# Altium PCB EMI_TestBoard_PCB.PcbDoc
Units mm, origin at the board's own origin, x right, y up, seen from the top; angles counter-clockwise.
Board outline 76 x 51 mm, 4 copper layers (L1 (Sig), L2 (GND), L3 (GND), L4 (Sig)), stack 1.369 mm thick; 63 components, 41 nets, 176 pads, 251 vias.
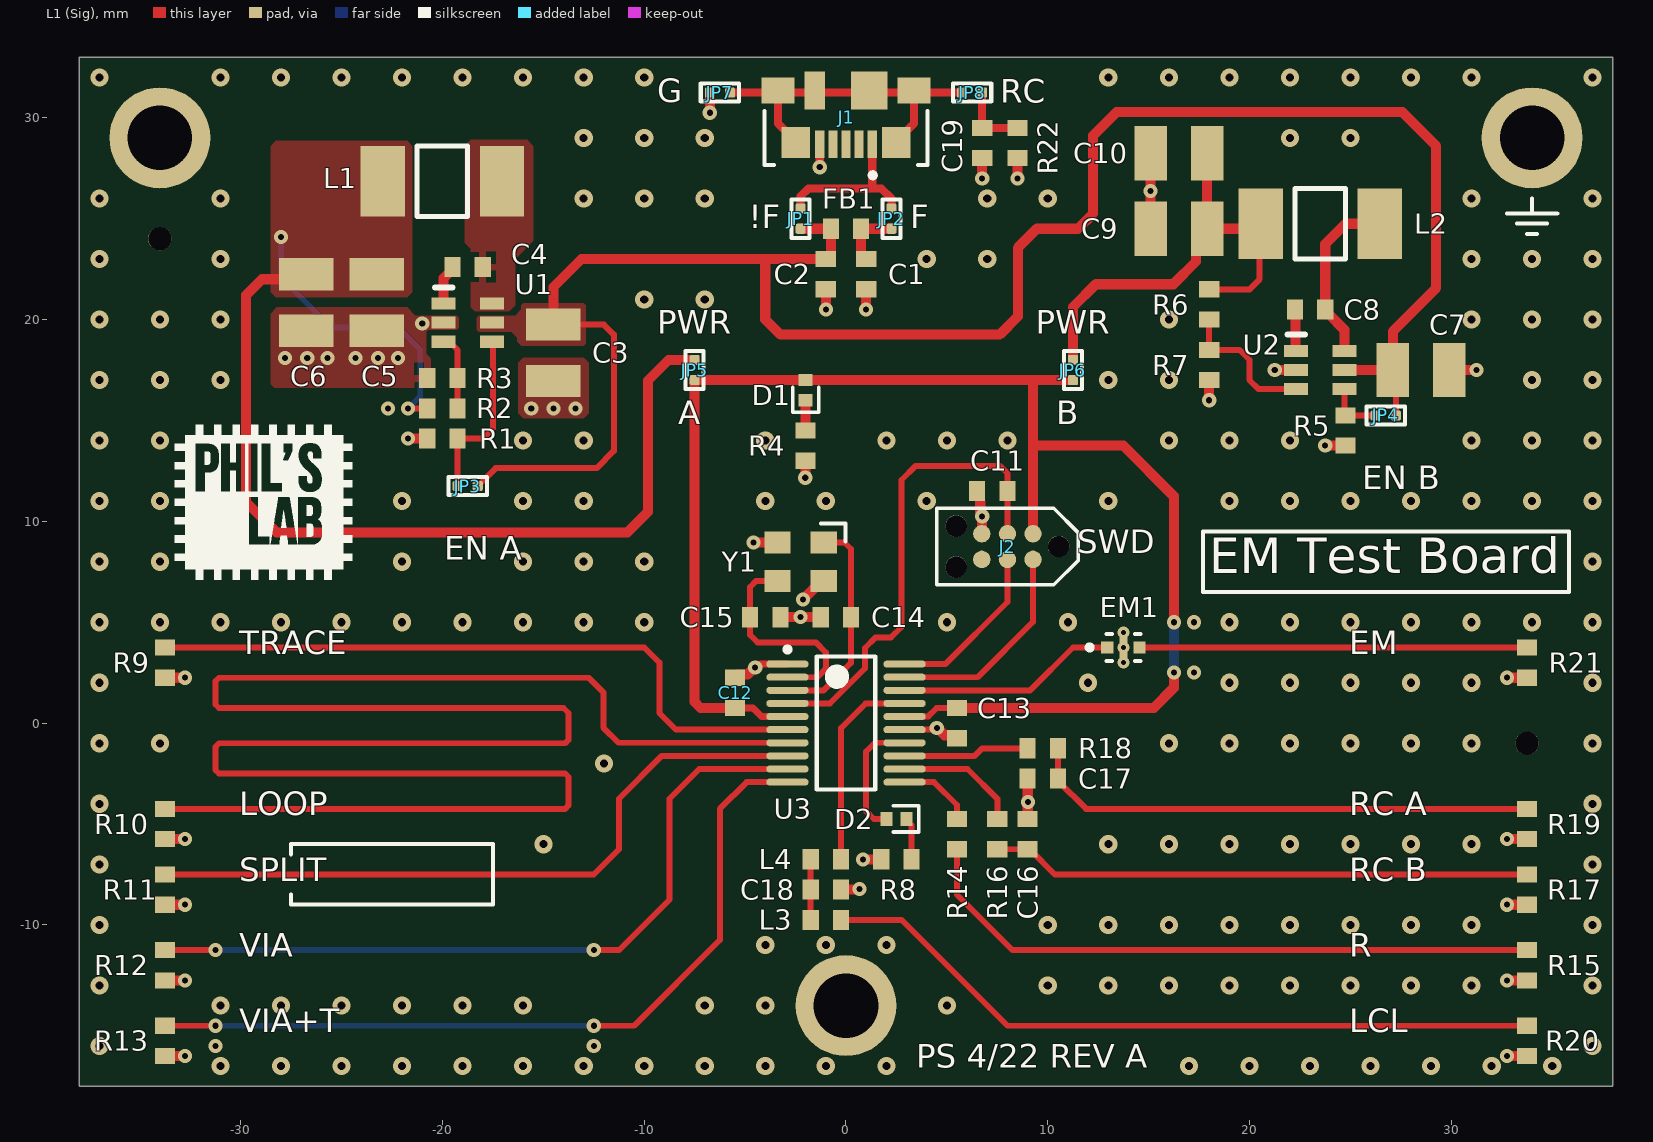
[diagram p0: L1 (Sig) view]
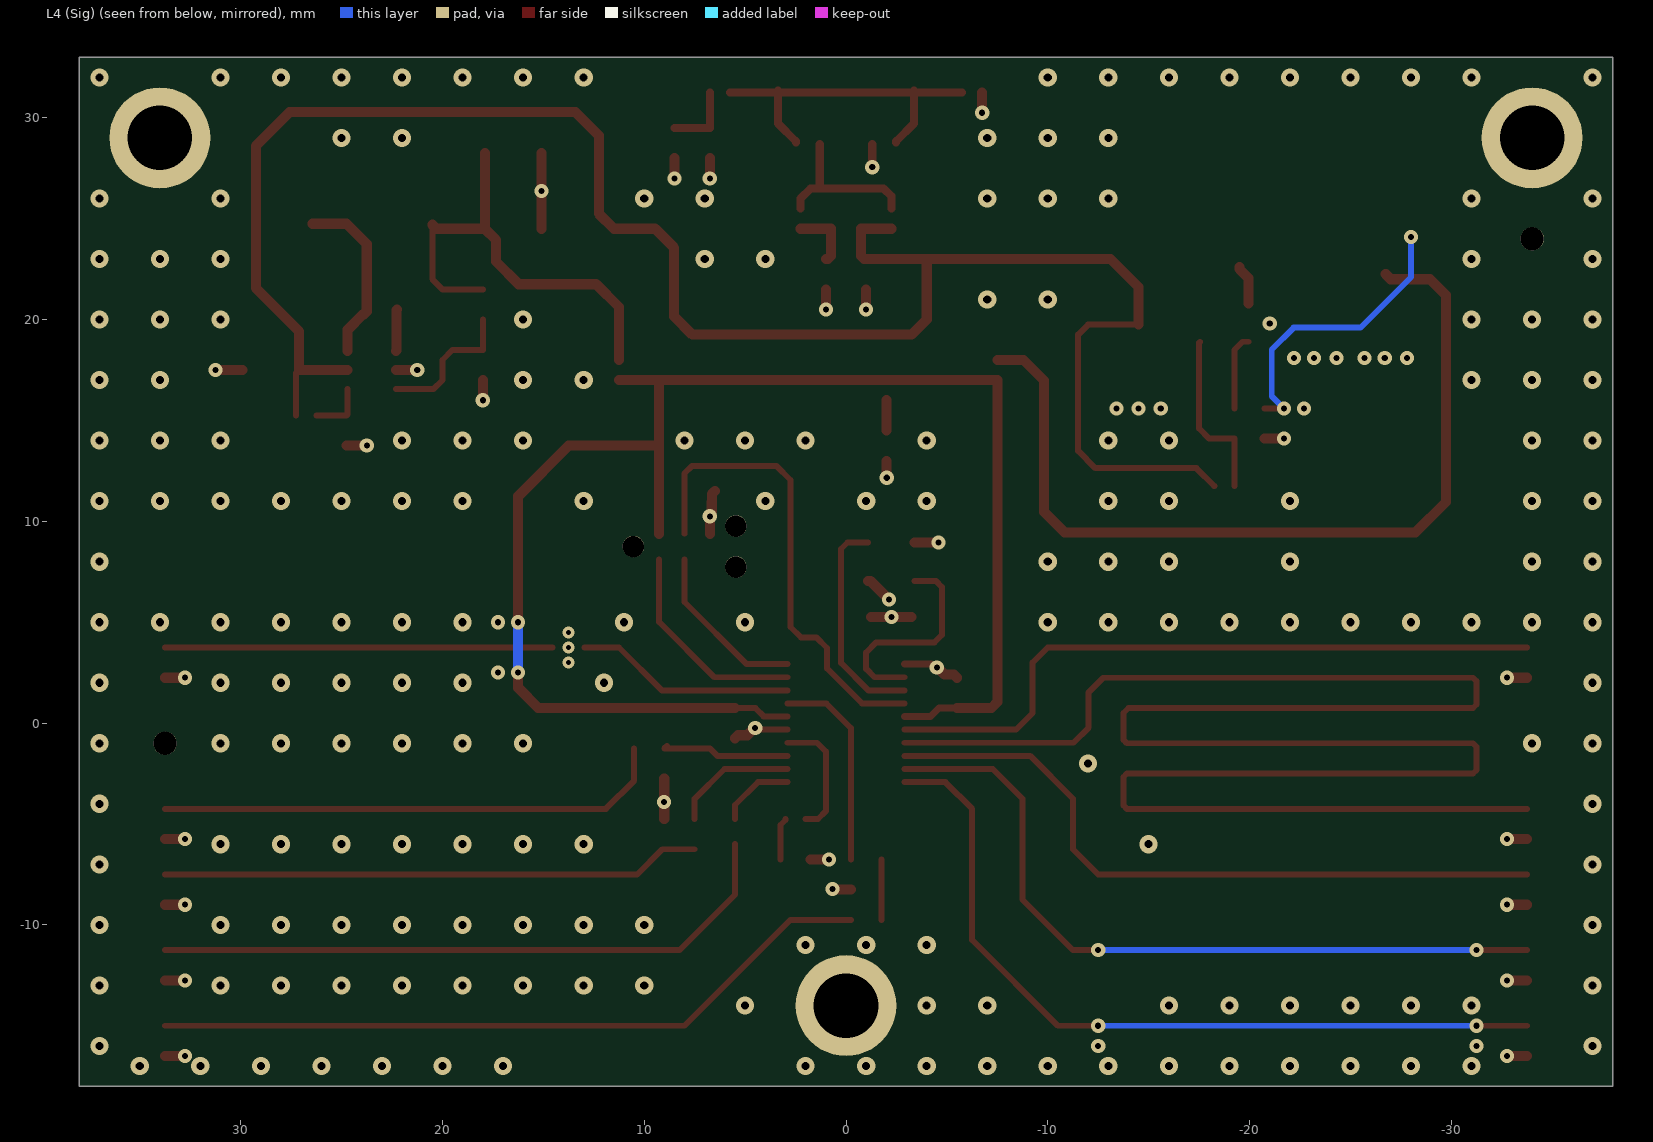
[diagram p1: L4 (Sig) view, seen from below]
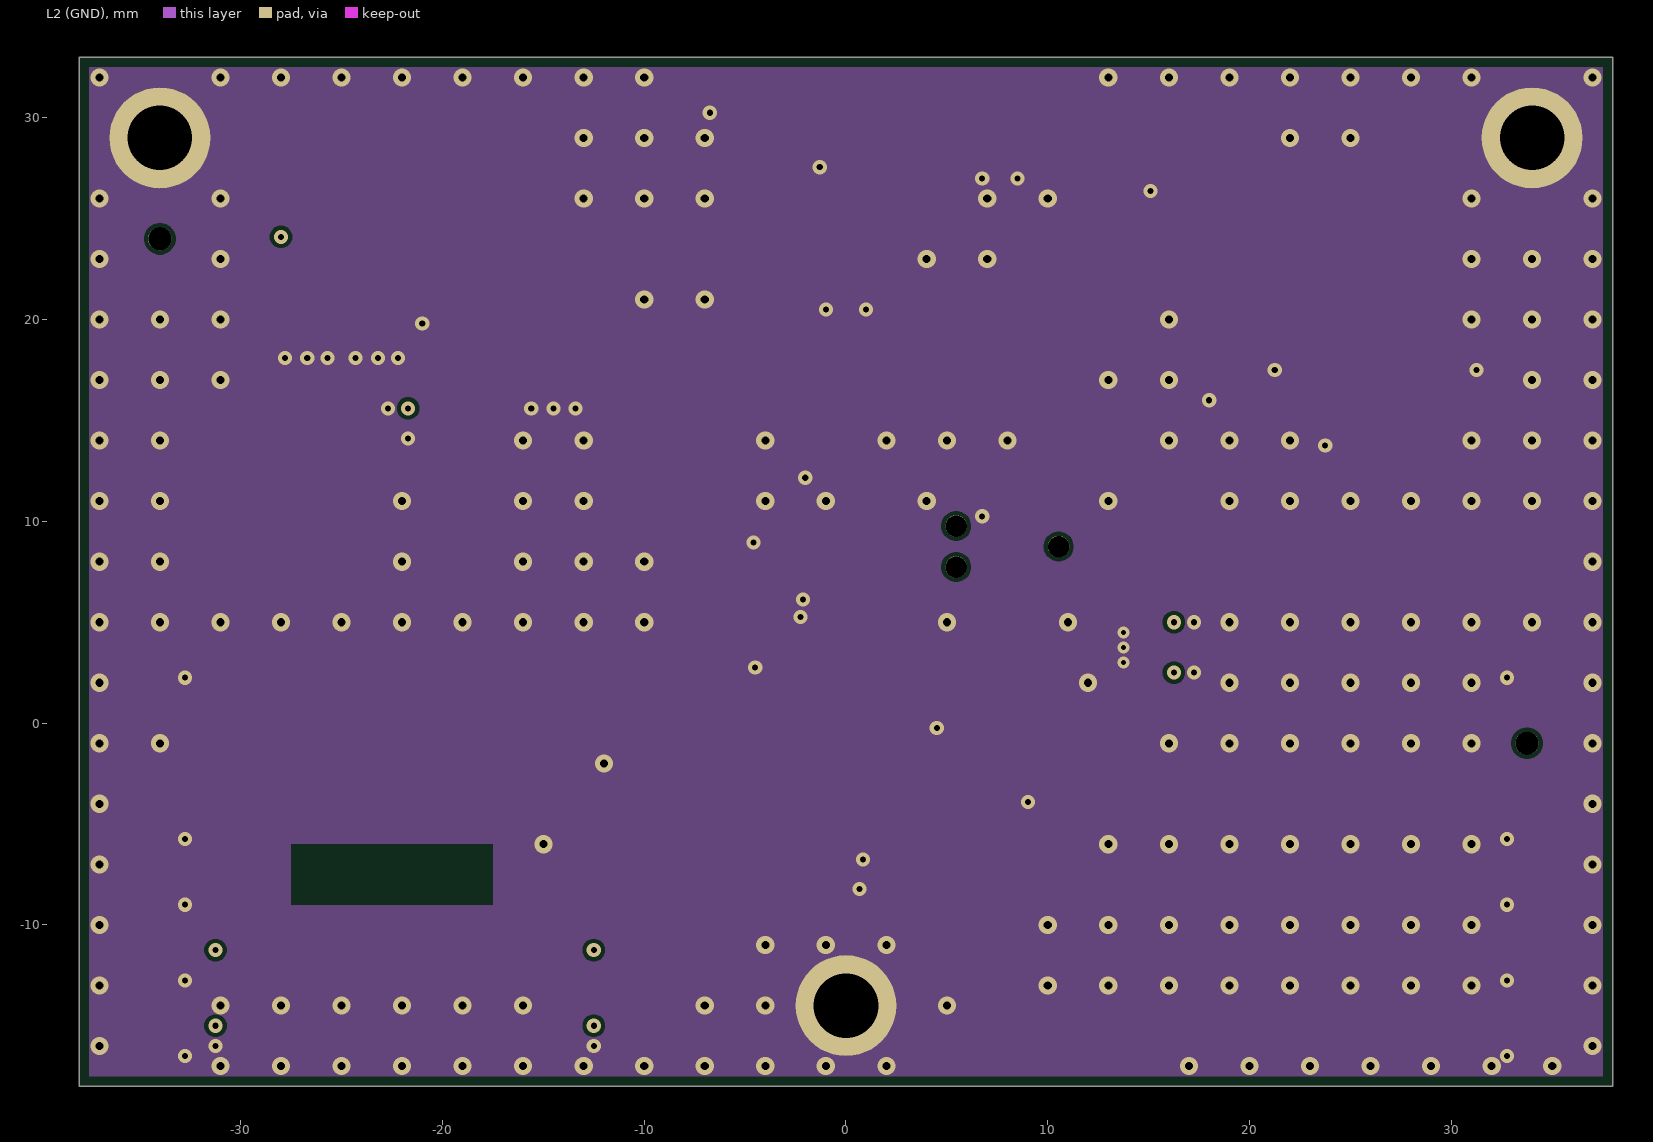
[diagram p2: L2 (GND)]
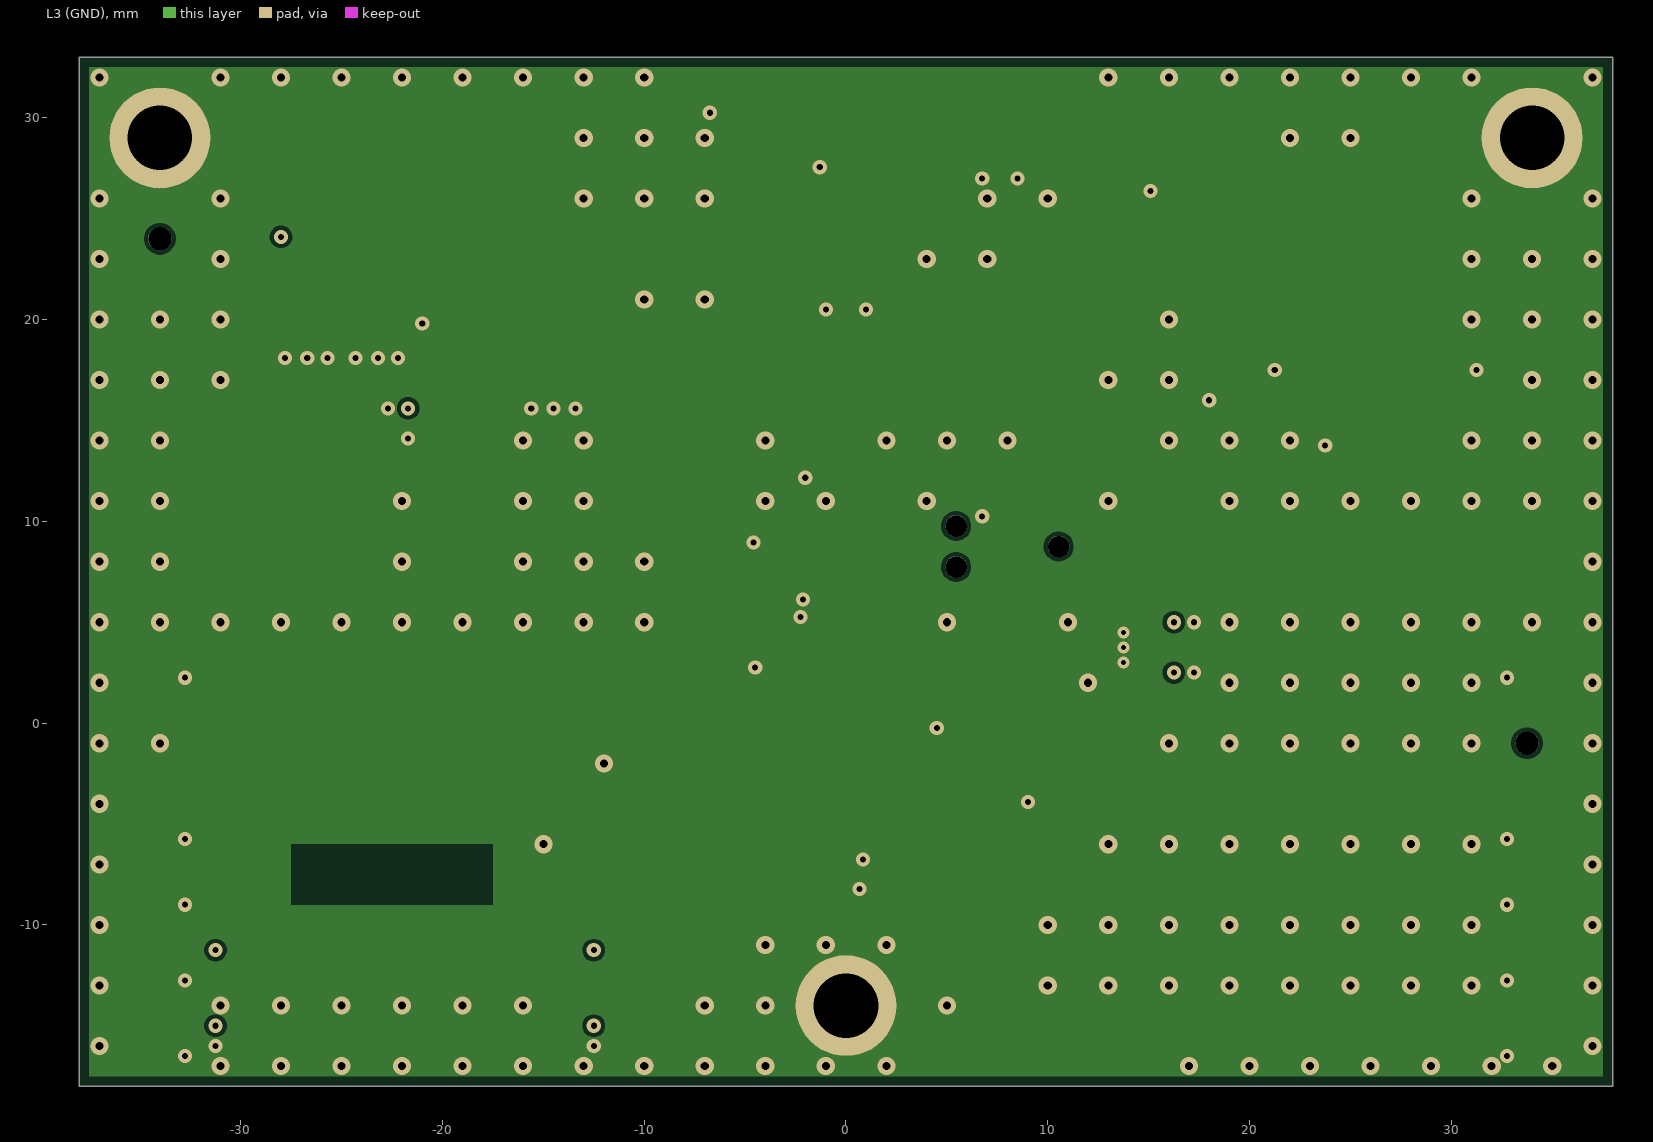
[diagram p3: L3 (GND)]
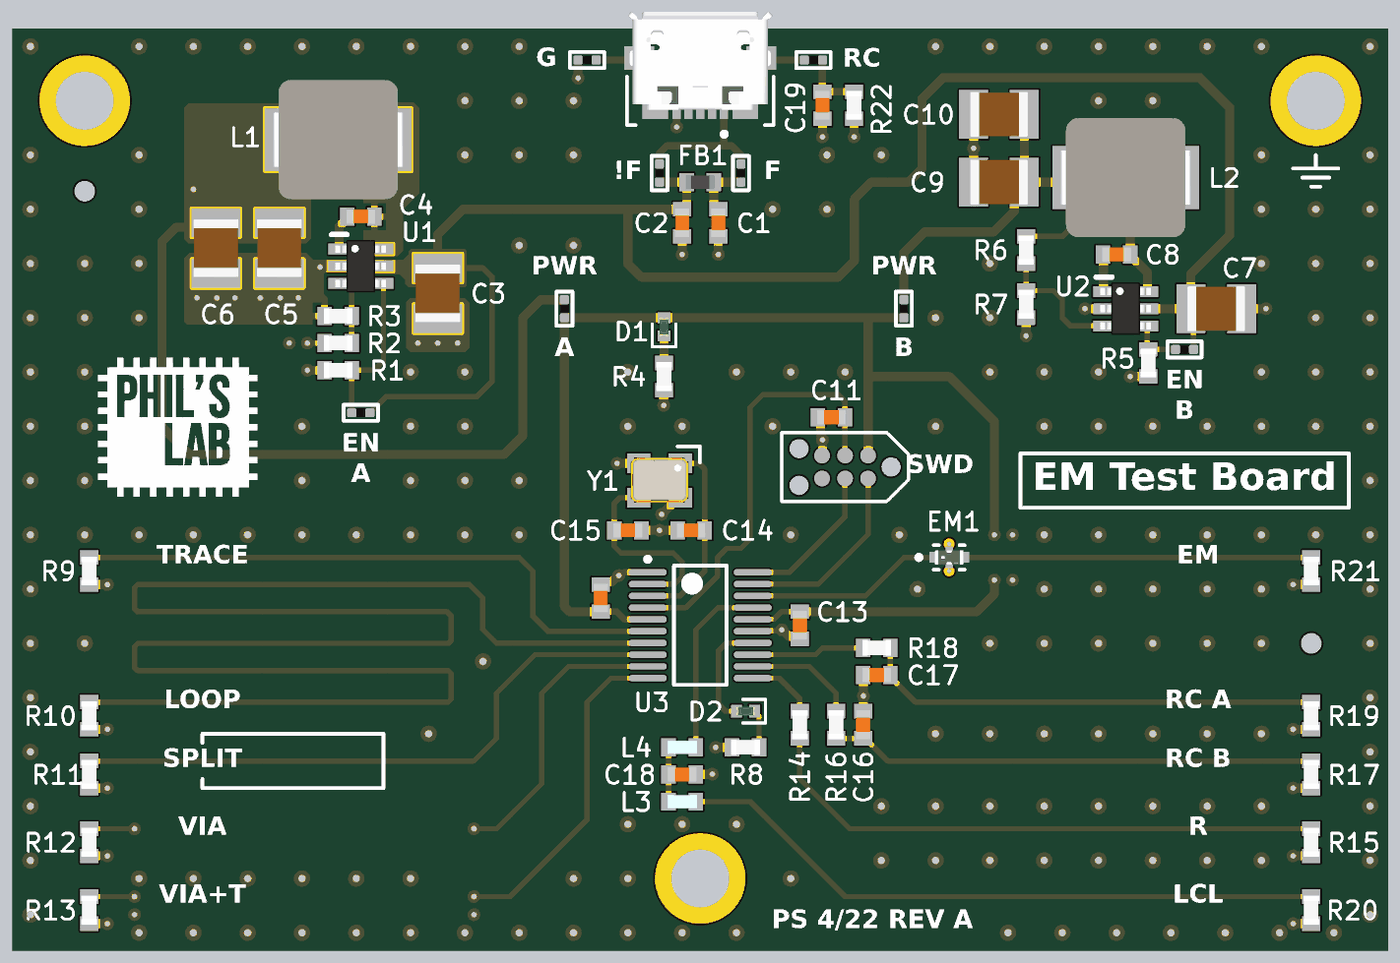
[diagram p4: 3D render of the assembled board from above, using the file's embedded part models]

## Layer stack, top to bottom
Top Solder: solder mask 0.0254, SM-001, Dk 4
L1 (Sig): signal copper 0.035
Dielectric 1: prepreg 0.1295, PP-017, Dk 4.3
Dielectric 2: prepreg 0.1295, PP-017, Dk 4.3
L2 (GND): signal copper 0.035
Dielectric 3: core 0.7112, Core-039, Dk 4.8
L3 (GND): signal copper 0.035
Dielectric 4: prepreg 0.1295, PP-017, Dk 4.3
Dielectric 5: prepreg 0.1295, PP-017, Dk 4.3
L4 (Sig): signal copper 0.035
Bottom Solder: solder mask 0.0254, SM-001, Dk 4

## Board outline
-38,-6 -38,33 38,33 38,-18 -38,-18

## Design rules (kind name [scope] priority, off if disabled: settings)
Clearance [All] p1: gap=0.2 ignorepadtopadclearanceinfootprint=FALSE
PolygonConnect [All] p1: connectstyle=Direct reliefconductorwidth=0.35 reliefentries=4 polygonreliefangle="90 Angle" airgapwidth=0.25
RoutingVias [All] p1: holewidth=0.711 width=1.27 viastyle="Through Hole" minholewidth=0.711 minwidth=1.27 maxholewidth=0.711 maxwidth=1.27
SolderMaskExpansion [All] p1: expansion=0.102 istentingtop=FALSE
Width [All] p1: maxlimit=0.5 minlimit=0.2 preferedwidth=0.254 midlayer1_minwidth=0.254 midlayer1_maxwidth=0.254 midlayer2_minwidth=0.254 midlayer2_maxwidth=0.254 minimp=50.000000 maximp=50.000000 favimp=50.000000
30 further rules are at their usual default settings.

## Components (designator, comment, footprint, x,y, rotation, side; value= is the part's Value field where it differs from the comment)
C1 "100n" CAP_0603 1,22.25 r90 top
C2 "100n" CAP_0603 -1,22.25 r90 top
C3 "22u" CAP_1210 -14.5,18.35 r90 top
C4 "100n" CAP_0603 -18.75,22.6 r180 top
C5 "22u" CAP_1210 -23.25,20.85 r90 top
C6 "22u" CAP_1210 -26.75,20.85 r90 top
C7 "22u" CAP_1210 28.5,17.5 r180 top
C8 "100n" CAP_0603 23,20.5 r180 top
C9 "22u" CAP_1210 16.5,24.5 r0 top
C10 "22u" CAP_1210 16.5,28.25 r0 top
C11 "100n" CAP_0603 7.25,11.5 r0 top
C12 "100n" CAP_0603 -5.5,1.5 r270 top
C13 "100n" CAP_0603 5.5,0 r90 top
C14 "10p" CAP_0603 -0.5,5.25 r0 top
C15 "10p" CAP_0603 -4,5.25 r180 top
C16 "33p" CAP_0603 9,-5.5 r270 top
C17 "330p" CAP_0603 9.75,-2.75 r0 top
C18 "330p" CAP_0603 -1,-8.25 r180 top
C19 "4n7" CAP_0603 6.75,28.75 r90 top
D1 "GREEN" LED_0402_GREEN -2,16.5 r270 top
D2 "GREEN" LED_0402_GREEN 2.5,-4.75 r0 top
EM1 "NFL18ST507X1C3D" FP-NFL18ST-MFG 13.75,3.75 r0 top
FB1 "120R" FB_0603 0,24.5 r180 top
J1 "473460001" FP-473460001-MFG 0,31 r180 top
J2 "DNP" TC2030-NL-FP 8,8.75 r180 top
JP1 "Solder Jumper" SolderJumper_Single -2.25,25 r270 top
JP2 "Solder Jumper" SolderJumper_Single 2.25,25 r270 top
JP3 "Solder Jumper" SolderJumper_Single -18.75,11.75 r0 top
JP4 "Solder Jumper" SolderJumper_Single 26.75,15.25 r0 top
JP5 "Solder Jumper" SolderJumper_Single -7.5,17.5 r90 top
JP6 "Solder Jumper" SolderJumper_Single 11.25,17.5 r90 top
JP7 "Solder Jumper" SolderJumper_Single -6.25,31.25 r0 top
JP8 "Solder Jumper" SolderJumper_Single 6.25,31.25 r180 top
L1 "47u" MWSA0603S -20,26.85 r180 top
L2 "47u" MWSA0603S 23.5,24.75 r180 top
L3 "220n" IND_0603 -1,-9.75 r180 top
L4 "220n" IND_0603 -1,-6.75 r0 top
R1 "10k" RES_0603 -20,14.1 r0 top
R2 "75k" RES_0603 -20,15.6 r0 top
R3 "24k" RES_0603 -20,17.1 r0 top
R4 "1k" RES_0603 -2,13.75 r90 top
R5 "10k" RES_0603 24.75,14.5 r90 top
R6 "75k" RES_0603 18,20.75 r270 top
R7 "24k" RES_0603 18,17.75 r90 top
R8 "1k" RES_0603 2.5,-6.75 r0 top
R9 "1k" RES_0603 -33.75,3 r90 top
R10 "1k" RES_0603 -33.75,-5 r90 top
R11 "1k" RES_0603 -33.75,-8.25 r90 top
R12 "1k" RES_0603 -33.75,-12 r90 top
R13 "1k" RES_0603 -33.75,-15.75 r90 top
R14 "49R9" RES_0603 5.5,-5.5 r270 top
R15 "1k" RES_0603 33.75,-12 r90 top
R16 "49R9" RES_0603 7.5,-5.5 r270 top
R17 "1k" RES_0603 33.75,-8.25 r90 top
R18 "49R9" RES_0603 9.75,-1.25 r0 top
R19 "1k" RES_0603 33.75,-5 r90 top
R20 "1k" RES_0603 33.75,-15.75 r90 top
R21 "1k" RES_0603 33.75,3 r90 top
R22 "1M" RES_0603 8.5,28.75 r90 top
U1 "TP6841S6" SOT-23-6 -18.75,19.85 r270 top
U2 "TP6841S6" SOT-23-6 23.5,17.5 r270 top
U3 "STM32F030F4P6TR" STM-TSSOP20_M 0,0 r0 top
Y1 "8MHz" XTAL_3225 -2.25,8 r180 top value=24MHz

## Footprints (in the part's own frame and the unit in brackets; to place one, negate y for a bottom-side part, rotate by r counter-clockwise, add the part's x,y. Pads: shape width x height; smd on the part's side, far side on the other; paste and mask are expansions set on the pad)
CAP_0603 [mm]
  rect 0.8x1 smd: 1(-0.75,0) 2(0.75,0)
  body extent -0.8,-0.4 0.8,0.4, height 0.51
CAP_1210 [mm]
  rect 1.6x2.7 smd: 1(-1.4,0) 2(1.4,0)
  body extent -1.6,-1.25 1.6,1.25, height 2.5
FB_0603 [mm]
  rect 0.8x1 smd: 1(-0.75,0) 2(0.75,0)
  body extent -0.8,-0.4 0.8,0.4, height 0.81
FP-473460001-MFG [mm]
  rect 0.45x1.38 smd paste+0 mask+0: 1(-1.3,2.31) 2(-0.65,2.31) 3(0,2.31) 4(0.65,2.31) 5(1.3,2.31)
  rect 1.425x1.55 smd paste+0 mask+0: 6(-2.488,2.225) 7(2.488,2.225)
  rect 1.65x1.3 smd paste+0 mask+0: 8(-3.375,-0.35) 11(3.375,-0.35)
  rect 1.8x1.9 smd paste+0 mask+0: 9(-1.15,-0.35)
  rect 1x1.9 smd paste+0 mask+0: 10(1.55,-0.35)
  silkscreen extent -4.05,0.67 4.05,3.97, body extent -4.3,-2.48 4.3,3.45, height 0.25
FP-NFL18ST-MFG [mm]
  rect 0.6x0.6 smd paste+0 mask+0: 1(-0.8,0) 3(0.8,0)
  rect 0.4x1.9 smd paste-1000 mask-1000: 2(0,0)
  silkscreen extent -1.8,-0.67 0.85,0.67, body extent -1.2,-1.05 1.2,1.05, height 0.25
IND_0603 [mm]
  rect 0.8x1 smd: 1(-0.75,0) 2(0.75,0)
  body extent -0.81,-0.37 0.81,0.37, height 0.87
LED_0402_GREEN [mm]
  rect 0.6x0.7 smd: A(-0.5,0) K(0.5,0)
  silkscreen extent -0.15,-0.65 1.1,0.65, body extent -0.51,-0.25 0.51,0.25, height 0.45
MWSA0603S [mm]
  rect 2.2x3.5 smd: 1(-2.95,0) 2(2.95,0)
  silkscreen extent -1.25,-1.75 1.25,1.75, body extent -3.6,-3.3 3.6,3.3, height 2.8
RES_0603 [mm]
  rect 0.8x1 smd: 1(-0.75,0) 2(0.75,0)
  body extent -0.8,-0.43 0.8,0.43, height 0.52
SolderJumper_Single [mm]
  rrect35% 0.5x0.5 smd mask+0: 1(-0.5,0) 2(0.5,0)
  silkscreen extent -0.95,-0.44 0.95,0.44
SOT-23-6 [mm]
  rect 0.6x1.2 smd: 1(-0.95,-1.2) 2(0,-1.2) 3(0.95,-1.2) 4(0.95,1.2) 5(0,1.2) 6(-0.95,1.2)
  silkscreen extent -1.75,-1.63 -1.75,-0.76, body extent -1.45,-1.4 1.45,1.4, height 1.45
STM-TSSOP20_M [mm] "SOP, 20-Leads, Body 6.6x4.5mm, Pitch 0.65mm, IPC Low Density"
  oval 2.1x0.35 smd: 1(-2.9,2.925) 2(-2.9,2.275) 3(-2.9,1.625) 4(-2.9,0.975) 5(-2.9,0.325) 6(-2.9,-0.325) 7(-2.9,-0.975) 8(-2.9,-1.625) 9(-2.9,-2.275) 10(-2.9,-2.925) 11(2.9,-2.925) 12(2.9,-2.275) 13(2.9,-1.625) 14(2.9,-0.975) 15(2.9,-0.325) 16(2.9,0.325) 17(2.9,0.975) 18(2.9,1.625) 19(2.9,2.275) 20(2.9,2.925)
  silkscreen extent -3.02,-3.3 1.45,3.77, body extent -2.25,-3.3 2.25,3.3, height 1.2
TC2030-NL-FP [mil]
  round 33.98 smd: 1(-50,-25) 2(-50,25) 3(0,-25) 4(0,25) 5(50,-25) 6(50,25)
  round 42.01 hole 42.01 unplated: MH(-100,0) MH(100,-40) MH(100,40)
  silkscreen extent -138,-75 138,75
XTAL_3225 [mm]
  rect 1.3x1.1 smd: 1(-1.15,-0.95) 2(1.15,-0.95) 3(1.15,0.95) 4(-1.15,0.95)
  silkscreen extent -2.23,-1.89 -1,-1, body extent -1.6,-1.28 1.6,1.22, height 0.61

## Part data
C1 C2 C4 C8 C11 C12 C13 C14 C15 C16 C17 C18 C19: library part CAP_0603_50V, "Capacitor SMD 0603 50V"
C3 C5 C6 C7 C9 C10: library part CAP_1210_10V, "Capacitor SMD 1210 10V"
D1 D2: library part LED_0402_GREEN, "LED 0402 GREEN SMD"
EM1: library part CMP-06051-000283-1, "LC combined filters 25pF 110nH 200MHz 16Vdc 150mA 0603", Capacitance=25pF, Case Code (Imperial)=0603, Case Code (Metric)=1608, Current=150mA, Inductance=110nH, Max Operating Temperature=125°C, Max Voltage Rating (DC)=16V, Min Operating Temperature=-55°C, Package Quantity=1, Case/Package=0603, Circuit Type=Filter, Current Rating=150mA, Depth=0.8mm, ESD Protection=No, Height=0.035inch, Lead Free="Lead Free", Length=1.6mm, Max Current Rating=150mA, Mount="Surface Mount", Number Of Channels=1, Packaging="Tape and Reel", Radiation Hardening=No, RoHS Compliant=Yes, Series="EMIFIL®, NFL18ST", Termination=Flat, Voltage Rating (DC)=16V, Width=0.031inch
FB1: library part FB_0603, "Ferrite Bead SMD 0603"
J1: library part CMP-2000-05246-2, "CONN RCPT USB2.0 MICRO B SMD R/A", Current Rating=1.8A, Manufacturer=Molex, Package=0, Temperature="-30°C to +85°C", Temperature Range High=+85°C, Temperature Range Low=-30°C, Voltage Rating=30V, Automotive=No, Category=Conn, ComponentLink2Description=Datasheet, ComponentLink2URL=https://www.molex.com/webdocs/datasheets/pdf/en-us/0473460001_IO_CONNECTORS.pdf, Conn Orientation="Right Angle", Contact Material=Gold,Nickel, Device Class L1=Connectors, Device Class L2="USB Connectors", Device Class L3=unset, Digikey Description="CONN RCPT USB2.0 MICRO B SMD R/A", Footprint Url=https://www.molex.com/pdm_docs/sd/473460001_sd.pdf, Height=2.945mm, Is Female=yes, Lead Free=Yes, Manufacturer Part Number=473460001, Number Of Contacts=5, Octopart=https://octopart.com/47346-0001-molex-7164928, Pitch=0.65mm, RoHS=TRUE, Shielding=true, USB Standard="USB 2.0"
J2: library part TC2030-NL, "Tag-Connect No-Solder SWD Debug Connector (No Legs) DO NOT PLACE", Manufacturer=Tag-Connect, Manfucaturer Number=TC2030-NL-FP
JP1 JP2 JP3 JP4 JP5 JP6 JP7 JP8: library part SolderJumper_Single, "Solder Jumper Single 0.5mm Pitch"
L1 L2: library part MWSA0603S, "Power Inductor SMD Sunlord MWSA0603S", Manufacturer=Sunlord, Manufacturer Part Number=MWSA0603S-
L3 L4: library part IND_0603, "Inductor SMD 0603"
R1 R2 R3 R4 R5 R6 R7 R8 R9 R10 R11 R12 R13 R14 R15 R16 R17 R18 R19 R20 R21 R22: library part RES_0603, "Resistor SMD 0603"
U1 U2: "40V 0.8A 800kHz Synchronous Step-Down Converter", Manufacturer="TECH PUBLIC", Manufacturer Part Number=TP6841S6
U3: library part CMP-0304-00066-2, "ARM Cortex-M0 32-bit MCU, 16 KB Flash, 4 KB Internal RAM, 15 I/Os, 20-Pin TSSOP, -40 to 85 degC, Tape and Reel", I/Os (High Current)=15, Manufacturer=STMicroelectronics, Operating Frequency(F) (Processor speed) (MHz)=48, Package Description="20-Pin Thin Shrink Small Outline Package, Body 6.5 x 4.4 mm, Pitch 0.65 mm", Package Reference=TSSOP20, Supply Voltage(Vcc) min (V)=2.4, ComponentLink1Description="Manufacturer URL", ComponentLink1URL=http://www.st.com/, ComponentLink2Description=Datasheet, ComponentLink2URL=http://www.st.com/st-web-ui/static/active/en/resource/technical/document/datasheet/DM00088500.pdf, Core="ARM Cortex-M0", DatasheetVersion="Rev. 2", FLASH Size (Prog) (kB)=16, Internal RAM Size (kB)=4, Mounting Technology="Surface Mount", Packing="Tape and Reel", PartNumber=STM32F030F4P6TR
Y1: library part TSX-3225_24.0000MF15X-AC, "Crystal SMD 24MHz 10PPM 7pF 3225", Load Capacitance=7pF, Manufacturer=Epson, Manufacturer Number="TSX-3225 24.0000MF15X-AC", ESR=40R, Type=XTAL

## Free pads (board coordinates)
  round 5 hole 3.2: MH(-34,29) MH(0,-14) MH(34,29)
  round 1.152 hole 1.152 unplated: TH(-34,24) TH(33.75,-1)

## Via types
v1: diameter 0.9, hole 0.4, L1 (Sig) to L4 (Sig), tented both sides, 193 vias
v2: diameter 0.7, hole 0.3, L1 (Sig) to L4 (Sig), tented both sides, 55 vias
v3: diameter 0.6, hole 0.25, L1 (Sig) to L4 (Sig), 3 vias

## Nets (pads, with @x,y where several pads share a name; then routed paths per layer and width w, separated by ;. In a path a pad name is that pad's centre, name@x,y a point inside that pad or via, vN(x,y) a via of type N, cw(c..) or ccw(c..) an arc to the next point about the centre after c; other vN are vias at no path point)
+3V3: C12.2 C13.2 D1.A J2.1 JP5.1 JP6.1 U3.5 U3.16 | length 78.7
  L1 (Sig) w0.293: U3.16 2.911,0.336 4.081,0.336 4.495,0.75 C13.2
  L1 (Sig) w0.35: C12.2 -4.604,0.75 -4.179,0.325 U3.5
  L1 (Sig) w0.5: C12.2 -7.207,0.75 -7.5,1.043 JP5.1 9.25,17 ; C13.2 15.25,0.75 16.25,1.75 v2(16.25,2.5) ; J2.1 9.27,13.75 ; JP6.1 9.25,17 ; v2(16.25,5) 16.25,11.25 13.75,13.75 9.27,13.75 ; 9.25,17 9.27,16.98 9.27,13.75
  L4 (Sig) w0.5: v2(16.25,2.5) v2(16.25,5)
+3V3_BUCK1: C5.2 C6.2 JP5.2 L1.2 R2.1 | length 58.4
  L1 (Sig) w0.293: v2(-21.7,15.6) R2.1
  L1 (Sig) w0.5: C6.2 -27,22 -28.941,22 -29.735,21.206 -29.735,10.963 -28.217,9.445 -10.837,9.445 -9.81,10.472 -9.81,16.985 -8.796,18 JP5.2
  L4 (Sig) w0.293: v2(-28,24.1) -28,22.1 -25.5,19.6 -22.185,19.6 -21.1,18.515 -21.1,16.2 v2(-21.7,15.6)
+3V3_BUCK2: C9.2 C10.2 JP6.2 L2.2 R6.1 | length 23.4
  L1 (Sig) w0.3: R6.1 20,21.5 20.5,22 20.5,24.7 L2.2
  L1 (Sig) w0.5: JP6.2 11.25,20.62 12.38,21.75 16.224,21.75 17.35,22.876 17.35,23.95 C9.2 ; C10.2 C9.2 ; L2.2@20.5,24.7 20.3,24.5 C9.2
+5V: C2.2 C3.2 C7.2 FB1.2 JP1.2 JP3.2 JP4.2 U1.5 U2.5 | length 98.3
  L1 (Sig) w0.3: JP3.2 -17.362,12.638 -12.356,12.638 -11.5,13.494 -11.5,19.25 -12,19.75 C3.2 ; C7.2 27.25,17.35 JP4.2
  L1 (Sig) w0.5: C3.2 -14.5,21.612 -13.112,23 -4,23 ; JP1.2 FB1.2 -0.75,23.15 -0.9,23 C2.2 -4,23 ; U2.5 C7.2 27.1,19.413 29.25,21.563 29.25,28.604 27.576,30.278 13.411,30.278 12.25,29.117 12.25,25.25 11.5,24.5 9.459,24.5 8.514,23.555 8.514,20.151 7.613,19.25 -3.25,19.25 -4,20 -4,23
BUCK1_BST: C4.2 U1.1 | length 2
  L1 (Sig) w0.5: U1.1 -19.95,22.05 -19.5,22.5 C4.2
BUCK1_EN: JP3.1 R1.2 U1.4 | length 8.6
  L1 (Sig) w0.293: JP3.1 R1.2 -18,14.1 -17.5,14.6 -17.5,18.85 U1.4
BUCK1_FB: R2.2 R3.2 U1.3 | length 3.8
  L1 (Sig) w0.293: U1.3 -19.65,18.9 -19.25,18.5 R3.2 R2.2
BUCK1_SW: C4.1 L1.1 U1.6
BUCK2_BST: C8.2 U2.1 | length 2.1
  L1 (Sig) w0.5: C8.2 22.275,20.475 22.275,18.475 U2.1
BUCK2_EN: JP4.1 R5.2 U2.4 | length 2.8
  L1 (Sig) w0.293: R5.2 JP4.1
  L1 (Sig) w0.3: U2.4 24.7,15.3 R5.2
BUCK2_FB: R6.2 R7.2 U2.3 | length 7.2
  L1 (Sig) w0.293: R6.2 R7.2 19.5,18.5 20,18 20,17 20.45,16.55 U2.3
BUCK2_SW: C8.1 L2.1 U2.6 | length 8.8
  L1 (Sig) w0.5: U2.6 24.7,19.5 23.95,20.25 23.9,20.25 23.75,20.4 C8.1 23.75,23.75 24.75,24.75 L2.1
GND: C1.1 C2.1 C3.1 C5.1 C6.1 C7.1 C9.1 C10.1 C11.1 C12.1 C13.1 C14.1 C15.1 C16.1 C17.1 C18.1 C19.1 EM1.2 J1.5 J2.5 JP7.1 pad.MH R1.1 R3.1 R4.1 R5.1 R7.1 R8.1 R9.1 R10.1 R11.1 R12.1 R13.1 R15.1 R17.1 R19.1 R20.1 R21.1 R22.1 U1.2 U2.2 U3.1 U3.15 Y1.2 Y1.4 | length 42.5
  L1 (Sig) w0.293: U3.15 2.911,-0.314 4.436,-0.314 v2(4.5,-0.25)
  L1 (Sig) w0.35: v2(-4.5,2.75) -4.405,2.75 -4.23,2.925 U3.1
  L1 (Sig) w0.4: J1.5 v2(-1.3,27.55) v2@-1.25,27.5
  L1 (Sig) w0.5: R13.1 v2(-32.75,-16.5) ; R12.1 v2(-32.75,-12.75) ; R11.1 v2(-32.75,-9) ; R10.1 v2(-32.75,-5.75) ; R9.1 v2(-32.75,2.25) ; v2(-21.7,14.1) R1.1 ; v2(-6.75,30.25) JP7.1 ; C12.1 -5.35,2.4 -4.893,2.4 -4.543,2.75 v2(-4.5,2.75) ; v2(-4.592,8.952) -4.591,8.951 Y1.2 Y1.2 ; C15.1 v2(-2.25,5.25) C14.1 ; v2(-2.132,6.133) -2.117,6.133 -1.2,7.05 Y1.4 ; v2(-2.019,12.159) -2.01,12.169 -2.01,12.99 R4.1 ; v2(-1,20.5) C2.1 ; C18.1 -0.24,-8.24 0.656,-8.24 v2(0.666,-8.23) ; v2(0.851,-6.753) 0.853,-6.752 1.748,-6.752 R8.1 ; v2(1,20.5) C1.1 ; v2(4.5,-0.25) 4.543,-0.25 4.893,-0.6 5.35,-0.6 C13.1 ; C11.1 6.65,11.35 6.65,10.959 6.652,10.957 6.652,10.49 6.712,10.43 6.712,10.288 v2(6.75,10.25) 6.75,9.405 J2.5 ; v2(6.75,27) C19.1 ; v2(8.5,27) R22.1 ; C16.1 9.007,-4.743 9.007,-3.918 v2(9.014,-3.911) 9.007,-3.904 9.007,-2.757 C17.1 ; C9.1 C10.1 ; v2(18,16) R7.1 ; v2(21.25,17.5) U2.2 ; v2(23.75,13.75) R5.1 ; C7.1 v2(31.25,17.5) ; v2(32.75,-16.5) R20.1 ; v2(32.75,-12.75) R15.1 ; v2(32.75,-9) R17.1 ; v2(32.75,-5.75) R19.1 ; v2(32.75,2.25) R21.1
  other v1: -31,-17 -28,-17 -25,-17 -22,-17 -19,-17 -16,-17 -13,-17 -10,-17 -7,-17 -4,-17 -1,-17 2,-17 17,-17 20,-17 23,-17 26,-17 29,-17 32,-17 35,-17 -37,-16 37,-16 -31,-14 -28,-14 -25,-14 -22,-14 -19,-14 -16,-14 -7,-14 -4,-14 5,-14 -37,-13 10,-13 13,-13 16,-13 19,-13 22,-13 25,-13 28,-13 31,-13 37,-13 -4,-11 -1,-11 2,-11 -37,-10 10,-10 13,-10 16,-10 19,-10 22,-10 25,-10 28,-10 31,-10 37,-10 -37,-7 37,-7 -15,-6 13,-6 16,-6 19,-6 22,-6 25,-6 28,-6 31,-6 -37,-4 37,-4 -12,-2 -37,-1 -34,-1 16,-1 19,-1 22,-1 25,-1 28,-1 31,-1 37,-1 -37,2 12,2 19,2 22,2 25,2 28,2 31,2 37,2 -37,5 -34,5 -31,5 -28,5 -25,5 -22,5 -19,5 -16,5 -13,5 -10,5 5,5 11,5 19,5 22,5 25,5 28,5 31,5 34,5 37,5 -37,8 -34,8 -22,8 -16,8 -13,8 -10,8 37,8 -37,11 -34,11 -22,11 -16,11 -13,11 -4,11 -1,11 4,11 13,11 19,11 22,11 25,11 28,11 31,11 34,11 37,11 -37,14 -34,14 -16,14 -13,14 -4,14 2,14 5,14 8,14 16,14 19,14 22,14 31,14 34,14 37,14 -37,17 -34,17 -31,17 13,17 16,17 34,17 37,17 -37,20 -34,20 -31,20 16,20 31,20 34,20 37,20 -10,21 -7,21 -37,23 -31,23 4,23 7,23 31,23 34,23 37,23 -37,26 -31,26 -13,26 -10,26 -7,26 7,26 10,26 31,26 37,26 -13,29 -10,29 -7,29 22,29 25,29 -37,32 -31,32 -28,32 -25,32 -22,32 -19,32 -16,32 -13,32 -10,32 13,32 16,32 19,32 22,32 25,32 28,32 31,32 37,32
  other v2: -31.25,-16 -12.5,-16 17.25,2.5 17.25,5 -22.7,15.6 -15.6,15.6 -14.5,15.6 -13.4,15.6 -27.8,18.1 -26.7,18.1 -25.7,18.1 -24.3,18.1 -23.2,18.1 -22.2,18.1 -21,19.8 15.1,26.375
  other v3: 13.75,3 13.75,3.75 13.75,4.5
HSE_IN: C15.2 U3.2 Y1.3 | length 10.8
  L1 (Sig) w0.293: Y1.3 -4.45,7.05 -4.75,6.75 C15.2 -4.75,4.368 -4.382,4 -1.5,4 -1,3.5 -1,2.687 -1.412,2.275 U3.2
HSE_OUT: C14.2 U3.3 Y1.1 | length 10.8
  L1 (Sig) w0.293: U3.3 -1.11,1.625 0.25,2.985 C14.2 0.25,8.626 -0.074,8.95 Y1.1
MCU_LED_A: D2.A U3.14 | length 6.2
  L1 (Sig) w0.293: D2.A 1.388,-4.75 1,-4.362 1,-1.411 1.436,-0.975 U3.14
MCU_LED_K: D2.K R8.2 | length 2.1
  L1 (Sig) w0.293: D2.K 3,-4.8 3.25,-5.05 R8.2
NetC1_2: C1.2 FB1.1 JP2.2 | length 3.2
  L1 (Sig) w0.5: C1.2 0.9,23 0.75,23.15 FB1.1 JP2.2
NetC16_2: C16.2 R16.2 R17.2 | length 26.8
  L1 (Sig) w0.293: R16.2 C16.2 9.1,-6.25 10.35,-7.5 R17.2
NetC17_2: C17.2 R18.2 R19.2 | length 25.4
  L1 (Sig) w0.293: R18.2 10.5,-2.624 10.5,-2.85 11.9,-4.25 R19.2
NetC18_2: C18.2 L3.2 L4.1 | length 3
  L1 (Sig) w0.293: L3.2 L4.1
NetC19_2: C19.2 JP8.1 R22.2 | length 3.5
  L1 (Sig) w0.4: JP8.1 C19.2 R22.2
NetEM1_3: EM1.3 R21.2 | length 19.2
  L1 (Sig) w0.293: EM1.3 R21.2
NetJ1_6: J1.6 J1.7 J1.8 J1.9 J1.10 J1.11 JP7.2 JP8.2 | length 17.4
  L1 (Sig) w0.4: JP7.2 J1.11@-3.375,31.25 ; J1.11 J1.11@-3.375,31.25 ; J1.7 -2.488,28.838 -3.375,29.725 J1.11@-3.375,31.25 ; J1.6 2.488,28.838 3.375,29.725 J1.8@3.375,31.25 ; J1.8 J1.8@3.375,31.25 ; JP8.2 J1.8@3.375,31.25 ; J1.11@-3.375,31.25 J1.8@3.375,31.25
NetL3_1: L3.1 R20.2 | length 36.2
  L1 (Sig) w0.293: L3.1 2.75,-9.75 8,-15 R20.2
NetR14_2: R14.2 R15.2 | length 31.9
  L1 (Sig) w0.293: R14.2@5.5,-5.988 5.5,-8.5 8.25,-11.25 R15.2
NRST: C11.2 J2.3 U3.4 | length 23.8
  L1 (Sig) w0.293: U3.4 -0.798,0.975 0.943,2.716 0.943,3.726 1.467,4.25 2.233,4.25 2.75,4.767 2.75,12.048 3.452,12.75 7.627,12.75 8,12.377 C11.2 J2.3
PA0: R9.2 U3.6 | length 34
  L1 (Sig) w0.293: R9.2 -13.5,3.75 -10,3.75 -9.25,3 -9.25,0.5 -8.425,-0.325 U3.6
PA1: R10.2 U3.7 | length 108.9
  L1 (Sig) w0.293: R10.2 -13.922,-4.25 -13.75,-4.078 -13.75,-2.672 -13.922,-2.5 -31.078,-2.5 -31.25,-2.328 -31.25,-1.172 -31.078,-1 -13.922,-1 -13.75,-0.828 -13.75,0.5 -14,0.75 -31.078,0.75 -31.25,0.922 -31.25,2.078 -31.078,2.25 -12.75,2.25 -12.025,1.525 -12.025,-0.225 -11.275,-0.975 U3.7
PA2: R11.2 U3.8 | length 34.7
  L1 (Sig) w0.293: R11.2 -12.5,-7.5 -11.25,-6.25 -11.25,-3.75 -9.125,-1.625 U3.8
PA3: R12.2 U3.9 | length 37.5
  L1 (Sig) w0.293: R12.2 v2(-31.25,-11.25) ; v2(-12.5,-11.25) -11.25,-11.25 -8.75,-8.75 -8.75,-3.75 -7.275,-2.275 U3.9
  L4 (Sig) w0.293: v2(-31.25,-11.25) v2(-12.5,-11.25)
PA4: R13.2 U3.10 | length 39.7
  L1 (Sig) w0.293: R13.2 v2(-31.25,-15) ; v2(-12.5,-15) -10.5,-15 -6.25,-10.75 -6.25,-4.25 -4.925,-2.925 U3.10
  L4 (Sig) w0.293: v2(-31.25,-15) v2(-12.5,-15)
PA5: R14.1 U3.11 | length 3.8
  L1 (Sig) w0.293: U3.11 4.363,-2.925 5.5,-4.062 R14.1
PA6: R16.1 U3.12 | length 6.2
  L1 (Sig) w0.293: U3.12 6.025,-2.275 7.5,-3.75 R16.1
PA7: R18.1 U3.13 | length 6.4
  L1 (Sig) w0.293: U3.13 6.375,-1.625 6.75,-1.25 R18.1 R18.1@8.875,-1.125
PA9: L4.2 U3.17 | length 10.2
  L1 (Sig) w0.293: L4.2 -0.25,-0.25 0.975,0.975 U3.17
PA10: EM1.1 U3.18 | length 10.9
  L1 (Sig) w0.293: U3.18 9.125,1.625 11.25,3.75 EM1.1
PWR_LED_K: D1.K R4.2 | length 1.5
  L1 (Sig) w0.5: R4.2 D1.K
SWCLK: J2.4 U3.20 | length 8.5
  L1 (Sig) w0.293: U3.20 4.925,2.925 8,6 J2.4
SWDIO: J2.2 U3.19 | length 10.6
  L1 (Sig) w0.293: U3.19 6.525,2.275 9.27,5.02 J2.2
VBUS: J1.1 JP1.1 JP2.1 | length 8.2
  L1 (Sig) w0.4: JP1.1 -2.25,26.115 -1.865,26.5 1.3,26.5 ; J1.1 1.3,26.5 ; JP2.1 2.25,26 1.75,26.5 1.3,26.5
pads on no net: J1.2 J1.3 J1.4 J2.6 J2.MH

## Polygon pours and split planes (outlines as drawn)
GND on L1 (Sig) "NONET_L-01_P-001" (solid, pour order 6): -21.75,20.6 -21.35,20.2 -19.3,20.2 -19.2,20.1 -19.2,19.6 -19.3,19.5 -20.7,19.5 -20.8,19.4 -20.8,18.3 -20.6,18.1 -20.568,18.068 -20.568,16.632 -28.332,16.632 -28.5,16.8 -28.5,20.3 -28.2,20.6
+3V3_BUCK1 on L1 (Sig) "NONET_L-01_P-001" (solid, pour order 5): -21.75,28.85 -21.5,28.6 -21.5,21.35 -21.75,21.1 -28.25,21.1 -28.5,21.35 -28.5,28.6 -28.25,28.85 -24,28.85
GND on L1 (Sig) "NONET_L-01_P-001" (solid, pour order 4): -13,18.1 -12.75,17.85 -12.75,15.35 -13,15.1 -16,15.1 -16.25,15.35 -16.25,17.85 -16,18.1
+5V on L1 (Sig) "NONET_L-01_P-001" (solid, pour order 3): -16.4,20.2 -16.1,20.5 -16.1,20.7 -16,20.8 -13,20.8 -12.9,20.7 -12.9,18.8 -13,18.7 -16.1,18.7 -16.3,18.9 -16.3,19.1 -16.6,19.4 -18.2,19.4 -18.3,19.5 -18.3,20.1 -18.2,20.2
BUCK1_SW on L1 (Sig) "NONET_L-01_P-001" (solid, pour order 2): -16.7,20.4 -16.4,20.7 -16.4,23 -15.5,23.9 -15.5,28.6 -15.8,28.9 -18.6,28.9 -18.9,28.6 -18.9,23.8 -18.6,23.5 -18.6,20.6 -18.4,20.4
GND on L2 (GND) "GND_L2" (solid, pour order 7): -37.5,32.5 37.5,32.5 37.5,-17.5 -37.5,-17.5
GND on L3 (GND) "GND_L3" (solid, pour order 8): -37.5,32.5 37.5,32.5 37.5,-17.5 -37.5,-17.5

## Other copper
L2 (GND):
  pour cut-out: -27.5,-6 -17.5,-6 -17.5,-9 -27.5,-9
L3 (GND):
  pour cut-out: -27.5,-6 -17.5,-6 -17.5,-9 -27.5,-9

## Silkscreen, mask and mechanical layers (free items; w line width, h text height)
Top Overlay:
  drawing of 18 lines, arcs and shapes, not listed
  text "G" at -9.366,30.378 h2
  text "RC" at 7.655,30.346 h2
  text "!F" at -4.82,24.132 h2
  text "F" at 3.18,24.132 h2
  text "PWR" at -9.342,18.907 h2
  text "PWR" at 9.408,18.907 h2
  text "A" at -8.32,14.407 h2
  text "B" at 10.43,14.407 h2
  text "EN B" at 25.597,11.196 h2
  text "SWD" at 11.458,8.028 h2
  text "EN A" at -19.903,7.696 h2
  text "EM Test Board" at 18.012,6.823 h3
  text "TRACE" at -30.061,3.028 h2
  text "EM" at 24.939,3.028 h2
  text "LOOP" at -30.061,-4.972 h2
  text "RC A" at 24.939,-4.972 h2
  text "SPLIT" at -30.061,-8.222 h2
  text "RC B" at 24.939,-8.222 h2
  text "VIA" at -30.061,-11.972 h2
  text "R" at 24.939,-11.972 h2
  text "VIA+T" at -30.061,-15.722 h2
  text "LCL" at 24.939,-15.722 h2
  text "PS 4/22 REV A" at 3.485,-17.465 h2
Mechanical 1:
  the board outline again, w0.2